# Altium PCB Buchla6PosDist.PcbDoc
Units mm, origin at the board's own origin, x right, y up, seen from the top; angles counter-clockwise.
Board outline 366.91 x 78.36 mm, 2 copper layers (Top Layer, Bottom Layer); 30 components, 12 nets, 199 pads, 387 vias.
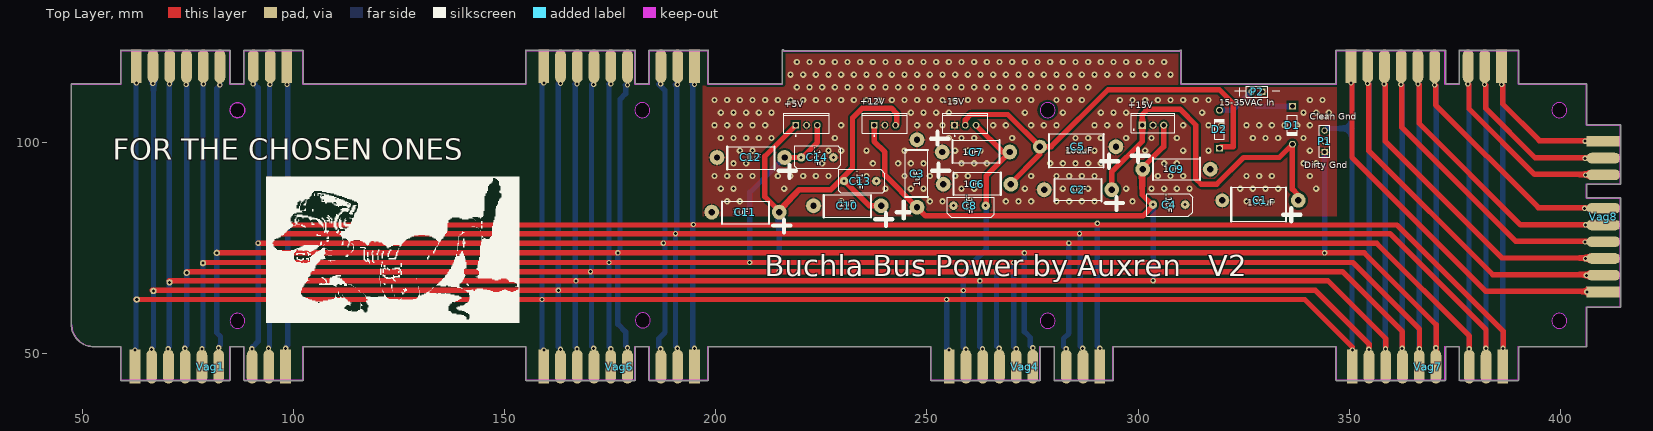
[diagram p0: Top Layer view]
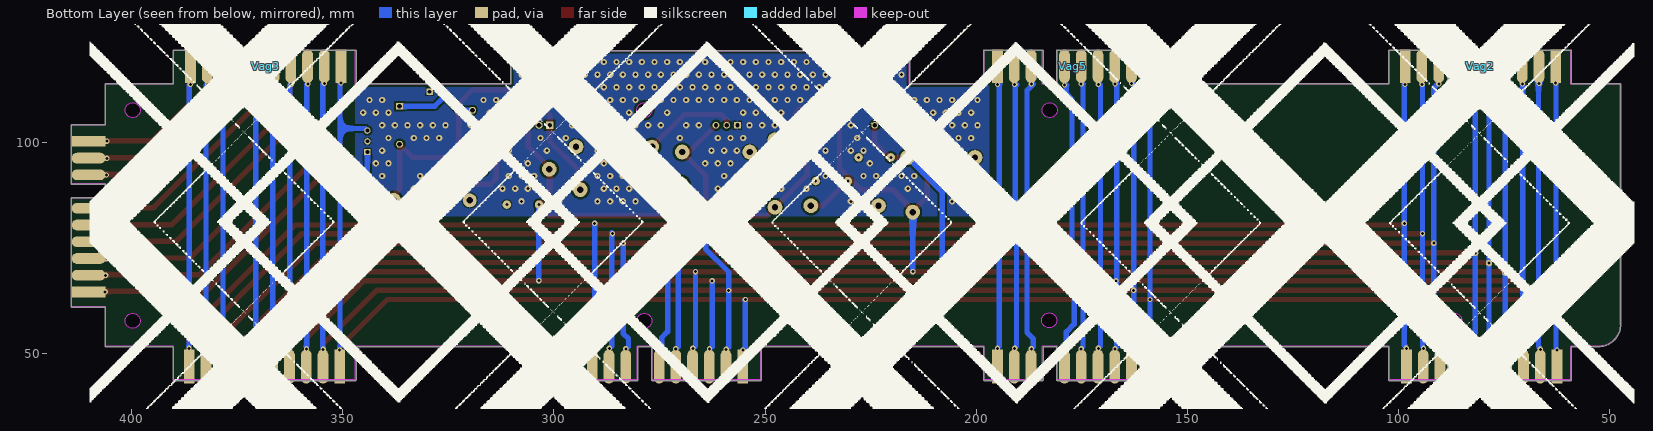
[diagram p1: Bottom Layer view, seen from below]

## Layer stack, top to bottom
Top Solder: solder mask 0.0102, Solder Resist, Dk 3.5
Top Layer: signal copper 0.0356
Dielectric 1: dielectric 0.32, FR-4, Dk 4.8
Bottom Layer: signal copper 0.0356
Bottom Solder: solder mask 0.0102, Solder Resist, Dk 3.5

## Board outline
59.152,43.688 84.843,43.688 ccw(c84.843,43.815) 84.97,43.815 84.97,51.688 88.216,51.688 88.216,43.815 ccw(c88.343,43.815) 88.343,43.688 102.152,43.688 ccw(c102.152,43.815) 102.279,43.815 102.279,51.688 154.971,51.688 154.971,43.815 ccw(c155.098,43.815) 155.098,43.688 180.789,43.688 ccw(c180.789,43.815) 180.916,43.815 180.916,51.688 184.161,51.688 184.161,43.815 ccw(c184.288,43.815) 184.288,43.688 198.098,43.688 ccw(c198.098,43.815) 198.225,43.815 198.225,51.688 250.914,51.688 250.914,43.815 ccw(c251.041,43.815) 251.041,43.688 276.732,43.688 ccw(c276.732,43.815) 276.859,43.815 276.859,51.688 280.104,51.688 280.104,43.815 ccw(c280.231,43.815) 280.231,43.688 294.041,43.688 ccw(c294.041,43.815) 294.168,43.815 294.168,51.688 346.864,51.688 346.864,43.815 ccw(c346.991,43.815) 346.991,43.688 372.682,43.688 ccw(c372.682,43.815) 372.809,43.815 372.809,51.688 376.054,51.688 376.054,43.815 ccw(c376.181,43.815) 376.181,43.688 389.993,43.688 ccw(c389.993,43.815) 390.12,43.815 390.12,51.688 406.151,51.688 ccw(c406.151,51.815) 406.278,51.815 406.278,61.003 414.151,61.003 ccw(c414.151,61.13) 414.278,61.13 414.278,86.82 ccw(c414.151,86.82) 414.151,86.947 406.278,86.947 406.278,90.193 414.151,90.193 ccw(c414.151,90.32) 414.278,90.32 414.278,104.13 ccw(c414.151,104.13) 414.151,104.257 406.278,104.257 406.278,113.815 ccw(c406.151,113.815) 406.151,113.942 390.12,113.942 390.12,121.815 ccw(c389.993,121.815) 389.993,121.942 376.181,121.942 ccw(c376.181,121.815) 376.054,121.815 376.054,113.942 372.809,113.942 372.809,121.815 ccw(c372.682,121.815) 372.682,121.942 346.991,121.942 ccw(c346.991,121.815) 346.864,121.815 346.864,113.942 310.239,113.942 310.239,121.815 ccw(c310.112,121.815) 309.985,121.815 309.985,121.793 216.027,121.793 216.027,121.92 ccw(c215.9,121.92) 216.027,121.92 ccw(c215.9,121.92) 215.773,121.92 215.751,113.942 198.225,113.942 198.225,121.815 ccw(c198.098,121.815) 198.098,121.942 184.288,121.942 ccw(c184.288,121.815) 184.161,121.815 184.161,113.942 180.916,113.942 180.916,121.815 ccw(c180.789,121.815) 180.789,121.942 155.098,121.942 ccw(c155.098,121.815) 154.971,121.815 154.971,113.942 102.279,113.942 102.279,121.815 ccw(c102.152,121.815) 102.152,121.942 88.343,121.942 ccw(c88.343,121.815) 88.216,121.815 88.216,113.942 84.97,113.942 84.97,121.815 ccw(c84.843,121.815) 84.843,121.942 59.152,121.942 ccw(c59.152,121.815) 59.025,121.815 59.025,113.942 47.498,113.942 ccw(c47.498,113.815) 47.373,113.793 47.373,56.895 ccw(c52.578,56.895) 52.555,51.69 ccw(c52.578,51.815) 52.578,51.688 59.025,51.688 59.025,43.815 ccw(c59.152,43.815)
cut-out: 84.926,57.81 ccw(c86.704,57.81) 86.704,56.032 ccw(c86.704,57.81) 88.482,57.81 ccw(c86.704,57.81) 86.704,59.588 ccw(c86.704,57.81)
cut-out: 86.704,105.943 cw(c86.704,107.721) 84.926,107.721 cw(c86.704,107.721) 86.704,109.499 cw(c86.704,107.721) 88.482,107.721 cw(c86.704,107.721)
cut-out: 180.811,107.721 ccw(c182.589,107.721) 182.589,105.943 ccw(c182.589,107.721) 184.367,107.721 ccw(c182.589,107.721) 182.589,109.499 ccw(c182.589,107.721)
cut-out: 180.938,57.937 ccw(c182.716,57.937) 182.716,56.159 ccw(c182.716,57.937) 184.494,57.937 ccw(c182.716,57.937) 182.716,59.715 ccw(c182.716,57.937)
cut-out: 276.823,57.81 ccw(c278.601,57.81) 278.601,56.032 ccw(c278.601,57.81) 280.379,57.81 ccw(c278.601,57.81) 278.601,59.588 ccw(c278.601,57.81)
cut-out: 397.981,57.81 ccw(c399.759,57.81) 399.759,56.032 ccw(c399.759,57.81) 401.537,57.81 ccw(c399.759,57.81) 399.759,59.588 ccw(c399.759,57.81)
cut-out: 397.981,107.721 ccw(c399.759,107.721) 399.759,105.943 ccw(c399.759,107.721) 401.537,107.721 ccw(c399.759,107.721) 399.759,109.499 ccw(c399.759,107.721)
cut-out: 276.823,107.721 ccw(c278.601,107.721) 278.601,105.943 ccw(c278.601,107.721) 280.379,107.721 ccw(c278.601,107.721) 278.601,109.499 ccw(c278.601,107.721)

## Design rules (kind name [scope] priority, off if disabled: settings)
Clearance [All] p1: gap=0.508
PolygonConnect [All] p1: connectstyle=Relief reliefconductorwidth=0.508 reliefentries=4 polygonreliefangle="90 Angle" airgapwidth=0.254
RoutingVias [All] p1: holewidth=0.711 width=1.27 viastyle="Through Hole" minholewidth=0.711 minwidth=1.27 maxholewidth=0.711 maxwidth=1.27
SolderMaskExpansion [All] p1: expansion=0.102
Width [All] p1: maxlimit=2.54 minlimit=0.508 preferedwidth=1.27
30 further rules are at their usual default settings.

## Components (designator, comment, footprint, x,y, rotation, side; value= is the part's Value field where it differs from the comment)
+5V "LM7805CT" NDE0003A 221.488,104.14 r0 top (schematic designator LM3)
+12V "LM7812CT" NDE0003A 240.03,104.14 r0 top (schematic designator LM2)
+15V "L7815ABV" TO220 303.53,104.14 r0 top (schematic designator L1)
-15V "LM7915CT" NDE0003A 259.08,104.14 r0 top (schematic designator LM1)
C1 "100uF" 100uF 328.93,86.36 r180 top
C2 "1uF" 1uF 285.75,88.9 r180 top
C3 "1uF" 1uF 247.65,92.71 r90 top
C4 ".1uF" .1uF 307.34,85.344 r180 top
C5 "100uF" 100uF 285.75,99.06 r180 top
C6 "1uF" 1uF 261.874,90.17 r0 top
C7 "1uF" 1uF 261.62,97.79 r0 top
C8 ".1uF" .1uF 260.096,85.09 r180 top
C9 "10uF" 1uF 309.118,93.726 r0 top
C10 "1uF" 1uF 231.14,85.09 r180 top
C11 "1uF" 1uF 207.01,83.566 r180 top
C12 "1uF" 1uF 208.28,96.52 r180 top
C13 ".1uF" .1uF 234.188,90.932 r180 top
C14 ".1uF" .1uF 224.028,96.52 r180 top
D1 "1N4001-T" DIOD-DO-41-P-2_V 336.55,104.14 r270 top
D2 "1N4001-T" DIOD-DO-41-P-2_V 319.278,103.196 r90 top
P1 "Header 3" HDR1X3 344.17,97.79 r90 top
P2 "Header 2" HDR1X2 329.438,112.086 r180 top
Vag1 "Component_1" BuchlaPower 62.433,46.99 r0 top
Vag2 "Component_1" BuchlaPower 62.738,118.11 r0 bottom
Vag3 "Component_1" BuchlaPower 350.418,118.11 r0 bottom
Vag4 "Component_1" BuchlaPower 255.27,46.99 r0 top
Vag5 "Component_1" BuchlaPower 159.258,118.11 r0 bottom
Vag6 "Component_1" BuchlaPower 159.258,46.99 r0 top
Vag7 "Component_1" BuchlaPower 350.723,46.99 r0 top
Vag8 "Component_1" BuchlaPower 410.21,64.668 r90 top

## Footprints (in the part's own frame and the unit in brackets; to place one, negate y for a bottom-side part, rotate by r counter-clockwise, add the part's x,y. Pads: shape width x height; smd on the part's side, far side on the other; paste and mask are expansions set on the pad)
1uF [mm]
  round 3.5 hole 1.5: 0(-8,0) 1(8,0)
  silkscreen extent -10.67,-2.54 5.59,4.83
100uF [mm]
  round 3.5 hole 1.5: 0(-9,0)
  round 3.3 hole 1.5: 1(9,0)
  silkscreen extent -9.53,-3.05 6.86,4.95
.1uF [mm]
  round 2 hole 0.7: 1(-3.81,0) 2(3.81,0)
BuchlaPower [mil]
  rect 100x315 smd: 1(0,0) 10(1404,0)
  rect 100x315 smd far side: 1(0,0) 10(1404,0)
  oval 100x315 smd: 2(156,0) 3(312,0) 4(468,0) 5(624,0) 6(780,0) 8(1092,0) 9(1248,0)
  oval 100x315 smd far side: 2(156,0) 3(312,0) 4(468,0) 5(624,0) 6(780,0) 8(1092,0) 9(1248,0)
DIOD-DO-41-P-2_V [mm] "2-Leads, Axial Lead, Body 4.635x2.36mm, Pin Spacing 9mm"
  rect 1.65x1.65 hole 1.15: 1(-4.5,0)
  round 1.65 hole 1.15: 2(4.5,0)
  silkscreen extent -2.32,-1.18 2.32,1.18, body extent -4.93,-1.18 4.93,1.18, height 2.35
HDR1X2 [mm] "Connector; Header; 2 Position"
  rect 1.5x1.5 hole 0.9: 1(0,0)
  round 1.5 hole 0.9: 2(2.54,0)
  silkscreen extent -1.27,-1.27 3.81,1.27
HDR1X3 [mm] "Connector; Header; 3 Position"
  rect 1.5x1.5 hole 0.9: 1(0,0)
  round 1.5 hole 0.9: 2(2.54,0) 3(5.08,0)
  silkscreen extent -1.27,-1.27 6.35,1.27
NDE0003A [mm] "FM, 3-Leads, Body 10.7x4.7mm, Pitch 2.54mm"
  rect 1.6x1.6 hole 1: 1(-2.54,0)
  round 1.6 hole 1: 2(0,0) 3(2.54,0)
  silkscreen extent -5.35,-2.62 5.35,2.85, body extent -5.4,-1.9 5.4,2.9, height 19.4
TO220 [mm] "TO, Thru-Hole, Vertical, Heatsink Mounted; 3 In-Line Leads; Pitch 2.54 mm"
  rect 1.7x1.7 hole 1.1: 1(-2.54,0)
  round 1.7 hole 1.1: 2(0,0) 3(2.54,0)
  silkscreen extent -5.2,-1.75 5.2,2.85, body extent -5.25,-1.8 5.25,2.9, height 19.7

## Part data
+5V +12V -15V: library part CMP-0062-02471-3, "3-Terminal Negative Regulator, 3-pin TO-220"
+15V: library part CMP-0244-00468-1, "15V Positive Regulator"
C1 C5: library part "100uF Sprague", "100uF Electrolytic"
C2 C3 C6 C7 C10 C11 C12: library part "100uF Sprague", "105TTA050M"
C4 C8 C13 C14: library part Cap, ".1uF Cap"
C9: library part "100uF Sprague", "10uF Electrolytic"
D1 D2: library part CMP-0639-00006-2, "1.0 A Rectifier, 15 pF, 50 V, -65 to 150 degC, 2-Pin DO-41 Plastic, RoHS, Tape and Reel"
P1: "Header, 3-Pin"
P2: "Header, 2-Pin"

## Free pads (board coordinates)
  round 1.524 hole 0.762: 2(81.802,73.914) 3(78.537,71.501) 4(74.676,69.215) 5(70.612,66.929) 6(66.802,64.897) 7(62.865,62.865)

## Via types
v1: diameter 1.5, hole 0.7, Top Layer to Bottom Layer, tented both sides, 290 vias
v2: diameter 1.27, hole 0.711, Top Layer to Bottom Layer, 72 vias
v3: diameter 1.27, hole 0.711, Top Layer to Bottom Layer, tented both sides, 25 vias

## Nets (pads, with @x,y where several pads share a name; then routed paths per layer and width w, separated by ;. In a path a pad name is that pad's centre, name@x,y a point inside that pad or via, vN(x,y) a via of type N, cw(c..) or ccw(c..) an arc to the next point about the centre after c; other vN are vias at no path point)
+5V: +5V.3 C12.0 C14.2 pad.3 Vag1.5 Vag2.5 Vag3.5 Vag4.5 Vag5.5 Vag6.5 Vag7.5 Vag8.5 | length 605.7
  Top Layer w1.27: pad.3@78.537,71.628 v3(174.701,71.628) v3(208.026,71.628) v3(270.535,71.628) 350.901,71.628 366.649,55.88 366.649,51.816 ; C12.0 219.202,96.52 220.472,96.52 224.028,100.076 +5V.3 ; v2@366.547,113.792 366.547,104.623 390.601,80.569 v2@406.146,80.569
  Bottom Layer w1.27: v2@78.537,51.689 pad.3 78.537,113.817 v2@78.765,114.046 ; v2@174.625,113.919 174.701,113.843 v3(174.701,71.628) 174.701,51.689 ; v3(208.026,71.628) 208.026,88.266 C12.0 ; 270.535,51.689 v3(270.535,71.628) ; v2@366.547,113.792 366.547,51.918 366.649,51.816
  other v2: 78.308,51.181 175.133,51.181 271.145,51.181 366.598,51.181 406.019,80.543 78.613,113.919 175.133,113.919 366.293,113.919
+12V: +5V.1 +12V.3 C10.0 C11.0 C13.2 pad.4 Vag1.4 Vag2.4 Vag3.4 Vag4.4 Vag5.4 Vag6.4 Vag7.4 Vag8.4 | length 665.2
  Top Layer w1.27: pad.4@74.676,69.469 v3(170.307,69.469) v3(266.471,69.469) 348.361,69.469 362.585,55.245 362.585,51.943 ; +5V.1 211.582,96.774 211.582,87.248 215.01,83.82 215.01,84.2 219.71,88.9 227.25,88.9 C13.2@229.87,91.52 ; C10.0 236.3,85.09 C13.2@229.87,91.52 ; +12V.3 242.824,104.394 242.824,106.934 241.554,108.204 234.696,108.204 232.37,105.878 232.37,94.02 C13.2@229.87,91.52 ; v2@362.483,113.665 362.483,103.607 389.458,76.632 v2@406.146,76.632
  Bottom Layer w1.27: v2@74.473,51.816 74.701,52.045 v2@74.701,113.919 ; v2@170.561,113.792 170.561,51.892 170.637,51.816 ; v3(215.01,69.47) C11.0@215.01,83.82 ; 266.471,51.816 v3(266.471,69.469) ; v2@362.483,113.665 362.585,113.563 362.585,51.943
  other v2: 74.244,51.308 171.069,51.308 267.081,51.308 362.534,51.308 405.892,76.479 74.549,113.792 171.069,113.792 362.229,113.792
+15V: +12V.1 +15V.3 C3.0 C4.2 C9.0 pad.5 Vag1.3 Vag2.3 Vag3.3 Vag4.3 Vag5.3 Vag6.3 Vag7.3 Vag8.3 | length 692
  Top Layer w1.27: pad.5@70.485,67.31 v3(166.878,67.31) 344.932,67.31 358.648,53.594 358.648,51.816 ; +12V.1 237.49,100.33 240.03,97.79 240.03,92.33 C3.0 249.683,82.677 301.157,82.677 303.57,85.09 300.99,87.67 300.99,93.98 306.07,99.06 +15V.3 ; v2@358.546,113.792 358.546,100.305 386.156,72.695 Vag8.3@406.273,72.695
  Bottom Layer w1.27: v2@70.536,51.689 70.536,113.817 v2@70.764,114.046 ; v2@166.624,113.919 166.7,113.843 166.7,51.689 ; 262.534,51.689 v3(262.534,67.285) ; v3@303.53,67.31 v3(303.57,67.35) C4.2@303.57,85.09 ; v2@358.546,113.792 358.546,51.918 358.648,51.816
  other v2: 70.307,51.181 167.132,51.181 263.144,51.181 358.597,51.181 406.019,72.542 70.612,113.919 167.132,113.919 358.292,113.919
-15V: -15V.3 C7.1 C8.1 pad.6 Vag1.2 Vag2.2 Vag3.2 Vag4.2 Vag5.2 Vag6.2 Vag7.2 Vag8.2 | length 622.7
  Top Layer w1.27: pad.6@66.548,65.024 v3(162.687,65.024) 342.011,65.024 354.711,52.324 354.711,51.689 ; -15V.3 267.97,97.79 C7.1 264.08,92.25 C8.1@264.08,85.09 ; v2@354.609,113.919 354.609,98.146 383.997,68.758 Vag8.2@406.4,68.758
  Bottom Layer w1.27: v2@66.599,51.562 66.827,51.791 Vag2.2@66.827,114.173 ; v2@162.687,114.046 v3(162.687,65.024) 162.687,51.638 162.763,51.562 ; 258.597,51.562 v3(258.597,64.999) 258.597,69.367 264.08,74.85 C8.1@264.08,85.09 ; v2@354.609,113.919 354.711,113.817 354.711,51.689
  other v2: 66.37,51.054 163.195,51.054 259.207,51.054 354.66,51.054 406.146,68.605 66.675,114.046 163.195,114.046 354.355,114.046
AGND: P1.3 pad.7 Vag1.1 Vag2.1 Vag3.1 Vag4.1 Vag5.1 Vag6.1 Vag7.1 Vag8.1 | length 585.8
  Top Layer w1.27: pad.7@62.611,62.865 pad.7 v3(158.826,62.865) v3(254.66,62.865) 339.471,62.865 350.774,51.562 ; v2@350.672,114.046 350.672,96.495 382.346,64.821 Vag8.1@406.527,64.821
  Bottom Layer w1.27: v2@62.662,51.435 62.662,114.071 Vag2.1@62.89,114.3 ; Vag5.1@158.75,114.173 158.826,114.097 v3(158.826,62.865) 158.826,51.435 ; 254.66,51.435 v3(254.66,62.865) ; P1.3 344.678,103.378 350.672,103.378 ; v2@350.672,114.046 350.672,103.378 ; 350.774,51.562 350.672,51.664 350.672,103.378
  other v2: 62.433,50.927 159.258,50.927 255.27,50.927 350.723,50.927 406.273,64.668 62.738,114.173 159.258,114.173 350.418,114.173
GND: +5V.2 +12V.2 +15V.2 -15V.1 C1.1 C2.1 C3.1 C4.1 C5.0 C6.0 C7.0 C8.2 C9.1 C10.1 C11.1 C12.1 C13.1 C14.1 P1.1 P1.2 P2.1 pad.2 Vag1.6 Vag2.6 Vag3.6 Vag4.6 Vag5.6 Vag6.6 Vag7.6 Vag8.6 | length 589.2
  Top Layer w1.27: pad.2 v3(176.784,73.914) v3(273.05,73.914) v3(344.17,73.914) 353.568,73.914 370.586,56.896 Vag7.6@370.586,47.625 ; v2@370.484,113.538 370.484,108.941 394.792,84.633 v2@406.019,84.633
  Bottom Layer w1.27: v2@82.474,51.943 82.702,52.172 82.702,54.088 81.802,54.988 pad.2 81.802,112.892 v2@82.702,113.792 ; v2@178.562,113.665 178.638,113.589 178.638,111.616 177.292,110.27 177.292,74.422 v3(176.784,73.914) 176.784,57.056 178.638,55.201 178.638,51.943 ; v3(273.05,73.914) 273.05,55.245 274.472,53.823 274.472,51.943 ; v3(344.17,73.914) P1.1 ; v2@370.484,113.538 370.586,113.436 370.586,52.07
  other v1: 202.678,86.138 205.678,86.138 229.678,86.138 250.678,86.138 253.678,86.138 259.678,86.138 268.678,86.138 271.678,86.138 274.678,86.138 280.678,86.138 283.678,86.138 286.678,86.138 289.678,86.138 298.678,86.138 307.678,86.138 325.678,86.138 328.678,86.138 331.678,86.138 201.178,89.138 204.178,89.138 216.178,89.138 240.178,89.138 246.178,89.138 249.178,89.138 258.178,89.138 261.178,89.138 273.178,89.138 282.178,89.138 285.178,89.138 288.178,89.138 297.178,89.138 303.178,89.138 306.178,89.138 309.178,89.138 312.178,89.138 324.178,89.138 327.178,89.138 330.178,89.138 333.178,89.138 342.178,89.138 199.678,92.138 202.678,92.138 205.678,92.138 208.678,92.138 214.678,92.138 217.678,92.138 220.678,92.138 223.678,92.138 226.678,92.138 235.678,92.138 244.678,92.138 247.678,92.138 250.678,92.138 256.678,92.138 259.678,92.138 274.678,92.138 280.678,92.138 283.678,92.138 286.678,92.138 289.678,92.138 304.678,92.138 307.678,92.138 310.678,92.138 325.678,92.138 328.678,92.138 331.678,92.138 340.678,92.138 204.178,95.138 207.178,95.138 225.178,95.138 237.178,95.138 243.178,95.138 246.178,95.138 249.178,95.138 258.178,95.138 261.178,95.138 264.178,95.138 279.178,95.138 282.178,95.138 285.178,95.138 288.178,95.138 291.178,95.138 306.178,95.138 309.178,95.138 339.178,95.138 342.178,95.138 205.678,98.138 208.678,98.138 226.678,98.138 229.678,98.138 235.678,98.138 244.678,98.138 256.678,98.138 259.678,98.138 262.678,98.138 283.678,98.138 286.678,98.138 289.678,98.138 301.678,98.138 310.678,98.138 316.678,98.138 340.678,98.138 201.178,101.138 204.178,101.138 207.178,101.138 210.178,101.138 213.178,101.138 228.178,101.138 255.178,101.138 258.178,101.138 261.178,101.138 270.178,101.138 285.178,101.138 288.178,101.138 291.178,101.138 297.178,101.138 303.178,101.138 309.178,101.138 327.178,101.138 330.178,101.138 333.178,101.138 339.178,101.138 199.678,104.138 202.678,104.138 205.678,104.138 208.678,104.138 211.678,104.138 229.678,104.138 247.678,104.138 250.678,104.138 253.678,104.138 265.678,104.138 268.678,104.138 274.678,104.138 277.678,104.138 280.678,104.138 289.678,104.138 292.678,104.138 295.678,104.138 310.678,104.138 316.678,104.138 319.678,104.138 325.678,104.138 328.678,104.138 331.678,104.138 334.678,104.138 337.678,104.138 340.678,104.138 201.178,107.138 204.178,107.138 207.178,107.138 210.178,107.138 213.178,107.138 246.178,107.138 249.178,107.138 252.178,107.138 255.178,107.138 273.178,107.138 282.178,107.138 291.178,107.138 294.178,107.138 297.178,107.138 315.178,107.138 339.178,107.138 342.178,107.138 345.178,107.138 199.678,110.138 202.678,110.138 205.678,110.138 208.678,110.138 211.678,110.138 214.678,110.138 217.678,110.138 220.678,110.138 223.678,110.138 226.678,110.138 229.678,110.138 232.678,110.138 235.678,110.138 238.678,110.138 241.678,110.138 244.678,110.138 247.678,110.138 250.678,110.138 253.678,110.138 256.678,110.138 259.678,110.138 262.678,110.138 265.678,110.138 268.678,110.138 271.678,110.138 274.678,110.138 280.678,110.138 283.678,110.138 286.678,110.138 295.678,110.138 298.678,110.138 301.678,110.138 304.678,110.138 307.678,110.138 310.678,110.138 313.678,110.138 316.678,110.138 340.678,110.138 343.678,110.138 219.178,113.138 222.178,113.138 225.178,113.138 228.178,113.138 231.178,113.138 234.178,113.138 237.178,113.138 240.178,113.138 243.178,113.138 246.178,113.138 249.178,113.138 252.178,113.138 255.178,113.138 258.178,113.138 261.178,113.138 264.178,113.138 267.178,113.138 270.178,113.138 273.178,113.138 276.178,113.138 279.178,113.138 282.178,113.138 285.178,113.138 288.178,113.138 217.678,116.138 220.678,116.138 223.678,116.138 226.678,116.138 229.678,116.138 232.678,116.138 235.678,116.138 238.678,116.138 241.678,116.138 244.678,116.138 247.678,116.138 250.678,116.138 253.678,116.138 256.678,116.138 259.678,116.138 262.678,116.138 265.678,116.138 268.678,116.138 271.678,116.138 274.678,116.138 277.678,116.138 280.678,116.138 283.678,116.138 286.678,116.138 289.678,116.138 292.678,116.138 295.678,116.138 298.678,116.138 301.678,116.138 304.678,116.138 307.678,116.138 219.178,119.138 222.178,119.138 225.178,119.138 228.178,119.138 231.178,119.138 234.178,119.138 237.178,119.138 240.178,119.138 243.178,119.138 246.178,119.138 249.178,119.138 252.178,119.138 255.178,119.138 258.178,119.138 261.178,119.138 264.178,119.138 267.178,119.138 270.178,119.138 273.178,119.138 276.178,119.138 279.178,119.138 282.178,119.138 285.178,119.138 288.178,119.138 291.178,119.138 294.178,119.138 297.178,119.138 300.178,119.138 303.178,119.138 306.178,119.138
  other v2: 82.245,51.435 179.07,51.435 275.082,51.435 370.535,51.435 405.765,84.48 82.55,113.665 179.07,113.665 370.23,113.665
NetC1_0: +15V.1 C1.0 C2.0 D1.2 | length 89.1
  Top Layer w1.27: C2.0 293.75,93.09 300.99,100.33 +15V.1 300.99,106.68 302.26,107.95 309.88,107.95 313.69,104.14 313.69,91.44 314.96,90.17 318.608,90.17 324.958,96.52 333.43,96.52 D1.2 336.55,89.01 337.82,87.74 C1.0@337.82,86.614
NetC5_1: -15V.2 C5.1 C6.1 D2.1 | length 100.9
  Top Layer w1.27: -15V.2 259.08,105.41 260.35,106.68 269.13,106.68 C5.1 ; C6.1@269.62,90.17 276.75,97.3 C5.1 ; D2.1 319.642,99.06 322.58,99.06 322.58,109.22 319.255,112.545 292.885,112.545 279.4,99.06 C5.1
NetD1_1: D1.1 D2.2 P2.2 | length 20.4
  Bottom Layer w1.27: D2.2 322.508,107.696 P2.2 ; 326.39,110.49 328.24,108.64 D1.1
NetVag1_8: Vag1.8 Vag2.8 Vag3.8 Vag4.8 Vag5.8 Vag6.8 Vag7.8 Vag8.8 | length 552.3
  Top Layer w1.27: v3(91.606,76.2) v3(187.579,76.2) v3(283.591,76.2) 356.489,76.2 378.46,54.229 378.46,51.816 ; v2@378.358,113.792 378.358,108.052 393.903,92.507 Vag8.8@406.273,92.507
  Bottom Layer w1.27: v2@90.348,51.689 91.606,52.947 v3(91.606,76.2) 91.606,113.017 v2@90.576,114.046 ; v2@186.436,113.919 187.96,112.395 187.96,55.093 186.436,53.569 186.436,51.765 186.512,51.689 ; 282.346,51.689 282.346,53.619 283.591,54.864 v3(283.591,76.2) ; v2@378.358,113.792 378.358,51.918 378.46,51.816
  other v2: 90.119,51.181 186.944,51.181 282.956,51.181 378.409,51.181 406.019,92.354 90.424,113.919 186.944,113.919 378.104,113.919
NetVag1_9: Vag1.9 Vag2.9 Vag3.9 Vag4.9 Vag5.9 Vag6.9 Vag7.9 Vag8.9 | length 548.7
  Top Layer w1.27: v3(94.285,78.486) v3(190.449,78.486) v3(286.131,78.486) 359.664,78.486 382.397,55.753 382.397,51.943 ; v2@382.295,113.665 382.295,108.179 394.03,96.444 v2@406.146,96.444
  Bottom Layer w1.27: v2@94.285,51.816 v3(94.285,78.486) 94.285,113.69 v2@94.513,113.919 ; v2@190.373,113.792 190.754,113.411 190.754,78.791 v3(190.449,78.486) 190.449,51.816 ; 286.283,51.816 v3@286.283,78.74 ; v2@382.295,113.665 382.397,113.563 382.397,51.943
  other v2: 94.056,51.308 190.881,51.308 286.893,51.308 382.346,51.308 405.892,96.291 94.361,113.792 190.881,113.792 382.041,113.792
NetVag1_10: Vag1.10 Vag2.10 Vag3.10 Vag4.10 Vag5.10 Vag6.10 Vag7.10 Vag8.10 | length 544.6
  Top Layer w1.27: v3@98.577,80.518 361.315,80.518 386.461,55.372 386.461,51.943 ; v2@386.359,113.665 386.359,109.195 395.046,100.508 v2@406.146,100.508
  Bottom Layer w1.27: v2@98.349,51.816 98.577,52.045 v3(98.577,80.899) v2@98.577,113.919 ; v2@194.437,113.792 194.513,113.716 194.513,51.816 ; 290.347,51.816 v3(290.347,80.899) ; v2@386.359,113.665 386.359,52.045 386.461,51.943
  other v2: 98.12,51.308 194.945,51.308 290.957,51.308 386.41,51.308 405.892,100.355 98.425,113.792 194.945,113.792 386.105,113.792
  other v3: 194.691,80.645

## Polygon pours and split planes (outlines as drawn)
GND on Top Layer "Mechanical 1-No Net" (solid, pour order 4): 196.85,82.55 196.85,113.538 216.154,113.538 216.154,121.666 309.88,121.666 309.88,113.792 309.903,113.815 346.991,113.815 346.991,82.577 346.964,82.55
GND on Bottom Layer "Mechanical 1-No Net" (solid, pour order 6): 196.85,82.55 196.85,113.538 216.154,113.538 216.154,121.666 309.88,121.666 309.88,113.792 309.903,113.815 346.991,113.815 346.991,82.577 346.964,82.55

## Keep-outs
Keep-Out Layer:
  circle w0.254: c399.759,107.721 r1.778
  circle w0.254: c399.759,57.81 r1.778
  circle w0.254: c278.601,107.721 r1.778
  circle w0.254: c278.601,57.81 r1.778
  circle w0.254: c182.589,107.721 r1.778
  circle w0.254: c182.716,57.937 r1.778
  circle w0.254: c86.704,107.721 r1.778
  circle w0.254: c86.704,57.81 r1.778
  lines w0.25: 47.498,113.815 47.498,56.895 ccw(c52.578,56.895) 52.578,51.815
  lines w0.254: 47.498,113.815 59.152,113.815 59.152,121.815 84.843,121.815 84.843,113.815 88.343,113.815 88.343,121.815 102.152,121.815 102.152,113.815 155.098,113.815 155.098,121.815 180.789,121.815 180.789,113.815 184.288,113.815 184.288,121.815 198.098,121.815 198.098,113.815 215.878,113.815 215.9,121.92 ; 52.578,51.815 59.152,51.815 59.152,43.815 84.843,43.815 84.843,51.815 88.343,51.815 88.343,43.815 102.152,43.815 102.152,51.815 155.098,51.815 155.098,43.815 180.789,43.815 180.789,51.815 184.288,51.815 184.288,43.815 198.098,43.815 198.098,51.815 251.041,51.815 251.041,43.815 276.732,43.815 276.732,51.815 280.231,51.815 280.231,43.815 294.041,43.815 294.041,51.815 346.991,51.815 346.991,43.815 372.682,43.815 372.682,51.815 376.181,51.815 376.181,43.815 389.993,43.815 389.993,51.815 406.151,51.815 406.151,61.13 414.151,61.13 414.151,86.82 406.151,86.82 406.151,90.32 414.151,90.32 414.151,104.13 406.151,104.13 406.151,113.815 389.993,113.815 389.993,121.815 376.181,121.815 376.181,113.815 372.682,113.815 372.682,121.815 346.991,121.815 346.991,113.815 310.112,113.815 310.112,121.815 ; 215.9,121.666 310.112,121.666

## Silkscreen, mask and mechanical layers (free items; w line width, h text height)
Top Overlay:
  drawing of 126 lines, arcs and shapes, not listed
  text "15-35VAC In" at 319.278,108.712 h1.52
  text "Clean Gnd" at 340.614,105.41 h1.52
  text "FOR THE CHOSEN ONES" at 57.15,96.012 h5
  text "Dirty Gnd" at 339.344,93.98 h1.52
  text "Buchla Bus Power by Auxren   V2" at 211.582,68.326 h5
Bottom Overlay:
  drawing of 560 lines, arcs and shapes, not listed

## Text inside footprints (layer, text, board x,y; h text height)
C9: Top Overlay "1uF" at 305.943,92.964 h1.52